# EAGLE board garbage2_halfrouted (EAGLE 5.06)
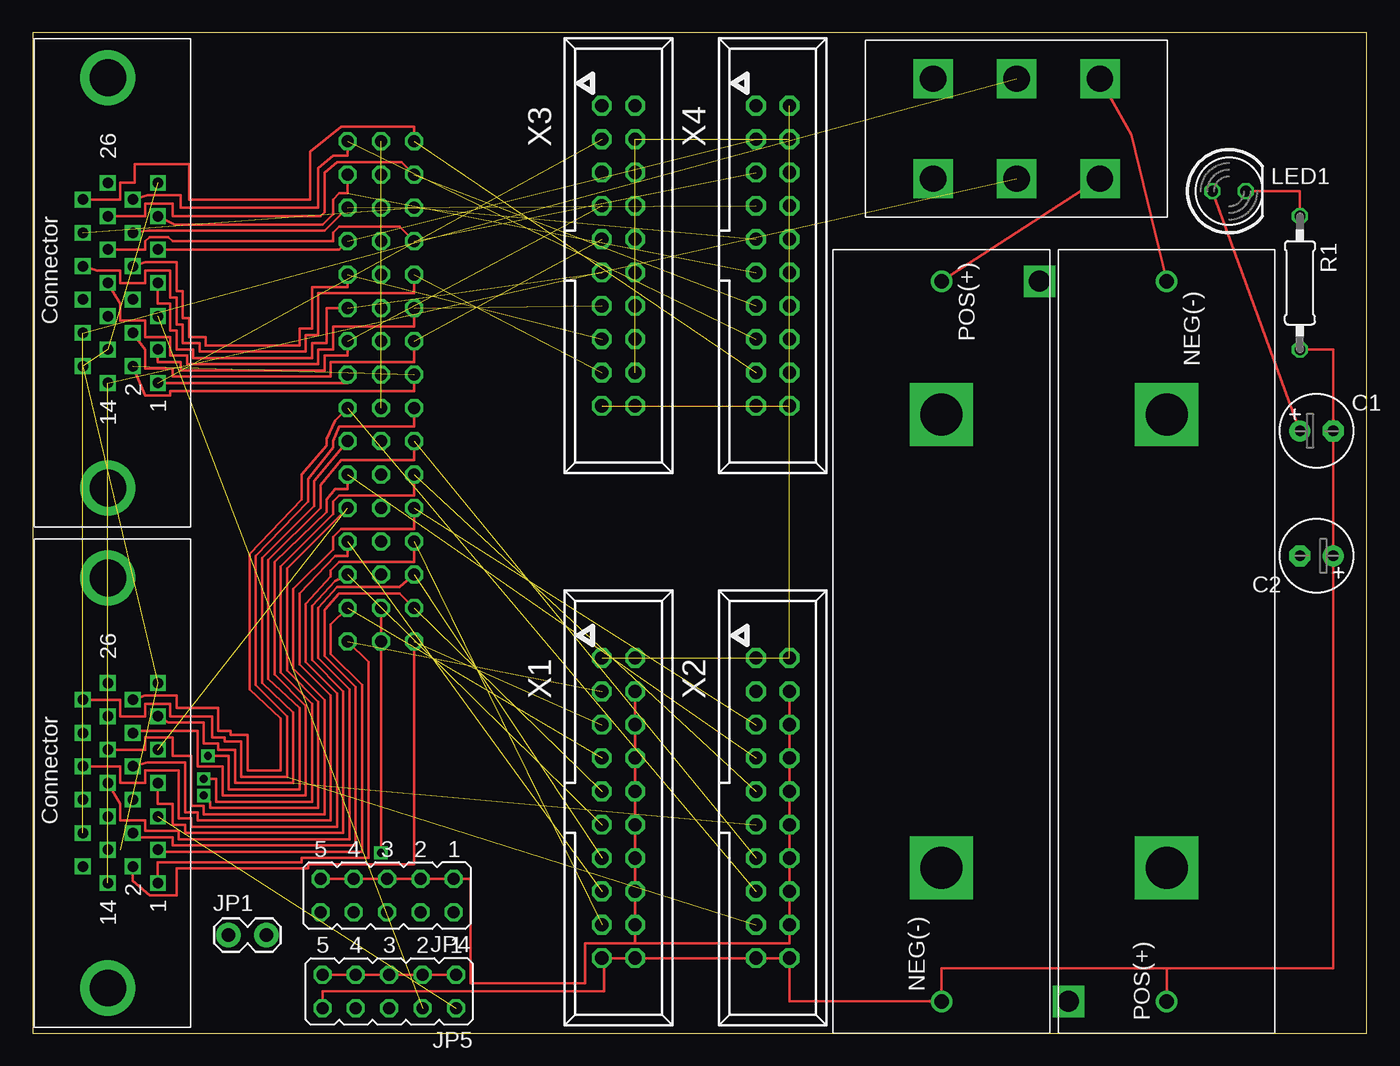
[diagram p0: board, top side]
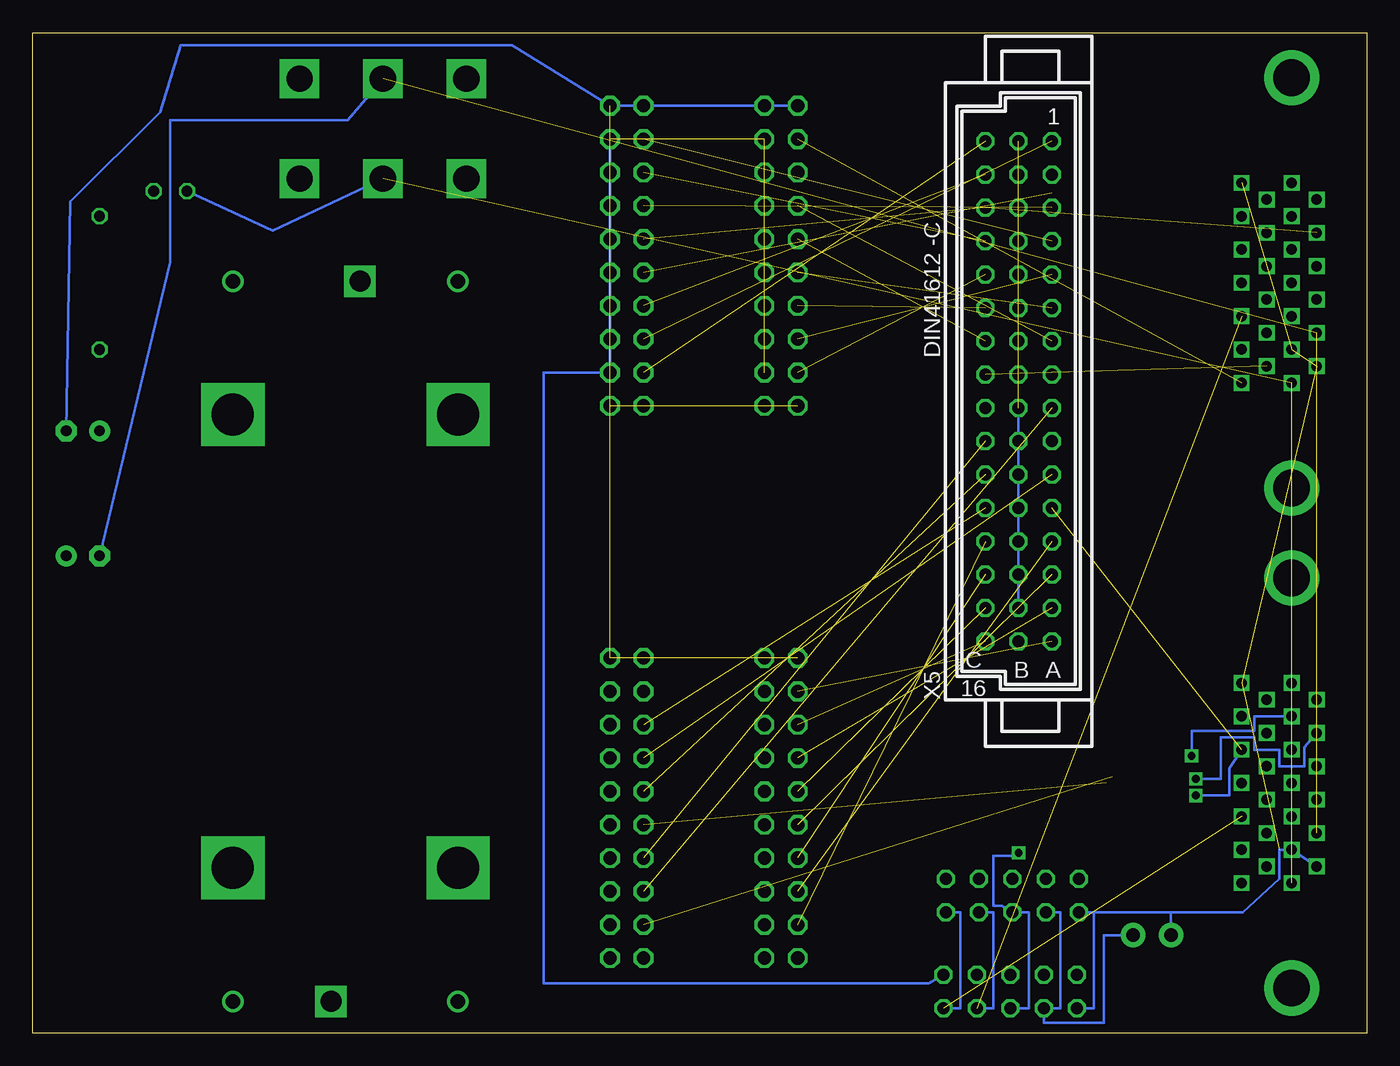
[diagram p1: board, bottom side, seen from below]

Size 101.6 x 76.2 mm. Coordinates in mm from the lower left corner, seen from the top.
Outline: 0,0 101.6,0 101.6,76.2 0,76.2 0,0
Copper layers (1*16): Top 0.0178mm / dielectric 1.4986mm / Bottom 0.0178mm
Design rules "SSC-EAGLE-2Lyr_v1.0.0.3": minimum track width 6mil, minimum drill 14mil, track to track 6mil, track to pad 6mil, pad to pad 6mil, via to via 6mil, smd to smd 6mil, copper to edge 20mil, drill to drill 16mil, minimum pad ring 8mil, minimum via ring 8mil, stop-mask expansion 3mil, vias tented up to drill 0mil, thermal gap 10mil

## Footprints (pad centres in the part's own frame; a part is rotated, then mirrored left to right if it is on the bottom)
MINI-DB26 = drill 0.8 square: P$1 7.62,3.81; P$2 6.35,1.905; P$3 5.08,3.81; P$4 3.81,1.905; P$5 2.54,3.81; P$6 1.27,1.905; P$7 0,3.81; P$8 -1.27,1.905; P$9 -2.54,3.81; P$10 -3.81,1.905; P$11 -5.08,3.81; P$12 -6.35,1.905; P$13 -7.62,3.81; P$14 7.62,0; P$15 6.35,-1.905; P$16 5.08,0; P$17 3.81,-1.905; P$18 2.54,0; P$19 1.27,-1.905; P$20 0,0; P$21 -1.27,-1.905; P$22 -2.54,0; P$23 -3.81,-1.905; P$24 -5.08,0; P$25 -6.35,-1.905; P$26 -7.62,0 | drill 2.8 round: P$27 15.621,0; P$28 -15.621,0
E2,5-6 = drill 0.813 pad 1.6 round: + -1.27,0 | drill 0.813 pad 1.6 octagon: - 1.27,0
1X02_LOCK = drill 1.016 pad 1.88 round: 1 -0.178,0; 2 2.718,0
JP5Q = drill 0.914 octagon: 1 -5.08,-1.27; 2 -5.08,1.27; 3 -2.54,-1.27; 4 -2.54,1.27; 5 0,-1.27; 6 0,1.27; 7 2.54,-1.27; 8 2.54,1.27; 9 5.08,-1.27; 10 5.08,1.27
LED5MM = drill 0.813 octagon: A -1.27,0; K 1.27,0
0207/10 = drill 0.813 octagon: 1 -5.08,0; 2 5.08,0
AA-BAT-BHAA-3 = drill 1.1 round: NEG -27.432,0; POS 27.432,0 | drill 1.6 square: P$3 27.432,-7.468 | drill 3.2 square: P$4 17.272,0; P$5 -17.272,0
SWITCH-DPST-S201031MS02Q = drill 2 square: PIN1 3.81,6.35; PIN2 3.81,0; PIN3 3.81,-6.35; PIN4 -3.81,6.35; PIN5 -3.81,0; PIN6 -3.81,-6.35
057-020-1 = drill 1 octagon: 1 -11.43,-1.27; 2 -11.43,1.27; 3 -8.89,-1.27; 4 -8.89,1.27; 5 -6.35,-1.27; 6 -6.35,1.27; 7 -3.81,-1.27; 8 -3.81,1.27; 9 -1.27,-1.27; 10 -1.27,1.27; 11 1.27,-1.27; 12 1.27,1.27; 13 3.81,-1.27; 14 3.81,1.27; 15 6.35,-1.27; 16 6.35,1.27; 17 8.89,-1.27; 18 8.89,1.27; 19 11.43,-1.27; 20 11.43,1.27
MAC48SH = drill 0.914 octagon: A1 2.54,19.05; A2 2.54,16.51; A3 2.54,13.97; A4 2.54,11.43; A5 2.54,8.89; A6 2.54,6.35; A7 2.54,3.81; A8 2.54,1.27; A9 2.54,-1.27; A10 2.54,-3.81; A11 2.54,-6.35; A12 2.54,-8.89; A13 2.54,-11.43; A14 2.54,-13.97; A15 2.54,-16.51; A16 2.54,-19.05; B1 0,19.05; B2 0,16.51; B3 0,13.97; B4 0,11.43; B5 0,8.89; B6 0,6.35; B7 0,3.81; B8 0,1.27; B9 0,-1.27; B10 0,-3.81; B11 0,-6.35; B12 0,-8.89; B13 0,-11.43; B14 0,-13.97; B15 0,-16.51; B16 0,-19.05; C1 -2.54,19.05; C2 -2.54,16.51; C3 -2.54,13.97; C4 -2.54,11.43; C5 -2.54,8.89; C6 -2.54,6.35; C7 -2.54,3.81; C8 -2.54,1.27; C9 -2.54,-1.27; C10 -2.54,-3.81; C11 -2.54,-6.35; C12 -2.54,-8.89; C13 -2.54,-11.43; C14 -2.54,-13.97; C15 -2.54,-16.51; C16 -2.54,-19.05

## Placement (x,y rotation side)
BANKA  MINI-DB26TYCO1761028-1  [MINI-DB26]  5.71,19.05 270 top
C1  [E2,5-6]  97.79,45.88 0 top
C2  [E2,5-6]  97.79,36.35 180 top
JP1  [1X02_LOCK]  15.08,7.46 0 top
JP4  [JP5Q]  26.99,10.48 180 top
JP5  [JP5Q]  27.15,3.17 180 top
LED1  [LED5MM]  91.12,64.14 0 top
R1  [0207/10]  96.52,57.15 270 top
U$1  AA-BAT-BHAA-3BHAA-3  [AA-BAT-BHAA-3]  86.36,29.84 270 top
U$2  AA-BAT-BHAA-3BHAA-3  [AA-BAT-BHAA-3]  69.22,29.84 90 top
U$3  MINI-DB26TYCO1761028-1  [MINI-DB26]  5.71,57.15 270 top
U$5  SWITCH-DPST-S201031MS02QDPST  [SWITCH-DPST-S201031MS02Q]  74.93,68.9 270 top
X1  057-020-1  [057-020-1]  44.61,17.14 270 top
X2  057-020-1  [057-020-1]  56.36,17.14 270 top
X3  057-020-1  [057-020-1]  44.61,59.21 270 top
X4  057-020-1  [057-020-1]  56.36,59.21 270 top
X5  MAC48SHE  [MAC48SH]  26.51,48.9 0 bottom

## Library data of the parts
BANKA U$1-U$3 U$5 = coxlab
C1 C2 R1 = resistor
JP1 = SparkFun
JP4 JP5 = jumper
LED1 = led
X1-X4 = con-panduit
X5 = con-vg

## Nets
C01: BANKA.P$1 X1.3 X5.A16
C02: BANKA.P$2 X1.5 X5.C16
C03: BANKA.P$3 X1.7 X5.A15
C04: BANKA.P$4 X1.9 X5.C15
C05: BANKA.P$7 X1.11 X5.A14
C06: BANKA.P$20 X1.13 X5.C14
C07: BANKA.P$8 X1.15 X5.A13
C08: BANKA.P$21 X1.17 X5.C13
C09: BANKA.P$9 X2.3 X5.A12
C10: BANKA.P$22 X2.5 X5.C12
C11: BANKA.P$10 X2.7 X5.A11
C12: BANKA.P$23 X2.9 X5.C11
C13: BANKA.P$11 X2.11 X5.A10
C14: BANKA.P$24 X2.13 X5.C10
C15: BANKA.P$12 X2.15 X5.A9
C16: BANKA.P$25 X2.17 X5.C9
C17: U$3.P$1 X3.3 X5.A8
C18: U$3.P$2 X3.5 X5.C8
C19: U$3.P$3 X3.7 X5.A7
C20: U$3.P$4 X3.9 X5.C7
C21: U$3.P$7 X3.11 X5.A6
C22: U$3.P$20 X3.13 X5.C6
C23: U$3.P$8 X3.15 X5.A5
C24: U$3.P$21 X3.17 X5.C5
C25: U$3.P$9 X4.3 X5.A4
C26: U$3.P$22 X4.5 X5.C4
C27: U$3.P$10 X4.7 X5.A3
C28: U$3.P$23 X4.9 X5.C3
C29: U$3.P$11 X4.11 X5.A2
C30: U$3.P$24 X4.13 X5.C2
C31: U$3.P$12 X4.15 X5.A1
C32: U$3.P$25 X4.17 X5.C1
GND: BANKA.P$13 BANKA.P$15 BANKA.P$16 C1.- C2.+ JP1.1 JP4.10 JP5.10 R1.2 U$1.POS U$2.NEG U$3.P$13 U$3.P$15 U$3.P$16 X1.1 X1.2 X1.19 X1.20 X2.1 X2.2 X2.19 X2.20 X3.1 X3.2 X3.19 X3.20 X4.1 X4.2 X4.19 X4.20
N$1: LED1.K R1.1
REF_OUT_A: JP4.1 JP4.3 JP4.5 JP4.7 JP4.9 X1.4 X1.6 X1.8 X1.10 X1.12 X1.14 X1.16 X1.18 X2.4 X2.6 X2.8 X2.10 X2.12 X2.14 X2.16 X2.18
REF_OUT_B: JP5.1 JP5.3 JP5.5 JP5.7 JP5.9 X3.4 X3.6 X3.8 X3.10 X3.12 X3.14 X3.16 X3.18 X4.4 X4.6 X4.8 X4.10 X4.12 X4.14 X4.16 X4.18
REFA: BANKA.P$5 JP4.2 JP5.2
REFB: JP4.4 JP5.4 U$3.P$5
SALINE: JP1.2 JP4.8 JP5.8
SELECT: JP4.6 JP5.6 X5.B1 X5.B2 X5.B3 X5.B4 X5.B5 X5.B6 X5.B7 X5.B8 X5.B9 X5.B10 X5.B11 X5.B12 X5.B13 X5.B14 X5.B15 X5.B16
V+: BANKA.P$14 C1.+ LED1.A U$3.P$14 U$5.PIN2
V-: BANKA.P$17 C2.- U$3.P$17 U$5.PIN5
VB+: U$2.POS U$5.PIN1
VB-: U$1.NEG U$5.PIN4

## Tracks (layer width: path | path; a pad name or v marks a point on that pad's centre or on a via)
C01  (1 unrouted)
  Top 0.203: BANKA.P$1 9.53,13.02 20.48,13.02 20.48,13.34 25.56,13.34 25.56,28.26 X5.A16
C02  (1 unrouted)
  Top 0.203: BANKA.P$2 7.62,11.59 8.89,10.48 10.95,10.48 10.95,12.54 20.95,12.54 20.95,12.86 29.05,12.86 X5.C16
C03  (1 unrouted)
  Top 0.203: 25.08,13.97 25.08,14.29 | 25.08,13.97 25.08,26.51 22.7,28.89 22.7,31.11 X5.A15 | 25.08,13.97 25.08,13.81 9.53,13.81 BANKA.P$3
C04  (1 unrouted)
  Top 0.203: X5.C15 27.94,33.5 23.34,33.5 22.23,32.23 22.23,28.73 24.61,26.35 24.61,14.29 10.64,14.29 10.64,14.92 8.26,14.92 BANKA.P$4 | X5.C15
C05  (1 unrouted)
  Top 0.203: X5.A14 23.02,34.45 21.27,32.54 21.27,28.42 23.65,26.04 23.65,15.24 11.59,15.24 11.59,15.88 10.64,15.88 10.64,17.46 9.53,17.46 BANKA.P$7
C06  (1 unrouted)
  Top 0.203: X5.C14 27.94,33.97 23.18,33.97 21.75,32.38 21.75,28.57 24.13,26.19 24.13,14.76 11.11,14.76 11.11,15.4 8.57,15.4 8.57,16.19 6.67,16.19 6.67,17.46 BANKA.P$20
C07  (1 unrouted)
  Top 0.203: X5.A13 23.97,36.35 23.02,36.35 20.32,33.5 20.32,28.1 22.7,25.72 22.7,16.19 12.54,16.19 12.54,16.83 11.59,16.83 11.59,20.64 8.73,20.64 BANKA.P$8
C08  (1 unrouted)
  Top 0.203: X5.C13 29.05,35.88 23.34,35.88 22.7,35.24 22.7,34.77 20.8,32.7 20.8,28.26 23.18,25.88 23.18,15.72 12.06,15.72 12.06,16.35 11.11,16.35 11.11,20 8.57,20 8.57,19.05 6.67,19.05 6.67,20.32 BANKA.P$21
C09  (via drill 0.6 pad 0.25)  (1 unrouted)
  Top 0.203: X5.A12 19.37,35.4 19.37,27.62 21.75,25.24 21.75,17.14 13.49,17.14 13.49,17.62 v13.02,18.1
  Bottom 0.203: v13.02,18.1 10.48,18.1 10.48,20.16 BANKA.P$9
C10  (1 unrouted)
  Top 0.203: X5.C12 29.05,38.42 23.5,38.42 22.86,37.78 22.86,36.83 19.84,33.81 19.84,27.78 22.23,25.4 22.23,16.67 13.02,16.67 13.02,17.3 12.06,17.3 12.06,21.11 10.64,21.11 10.64,22.54 8.57,22.54 8.57,21.59 BANKA.P$22
C11  (1 unrouted)
  Top 0.203: X5.A11 23.97,41.43 23.02,41.43 22.38,40.64 22.38,39.69 18.41,35.88 18.41,27.3 20.8,24.92 20.8,18.1 14.45,18.1 14.45,20.32 12.54,20.32 12.54,23.02 8.1,23.02 BANKA.P$10
C12  (via drill 0.6 pad 0.25)  (1 unrouted)
  Top 0.203: X5.C11 29.05,40.96 23.34,40.96 22.86,40.48 22.86,39.53 18.89,35.56 18.89,27.46 21.27,25.08 21.27,17.62 13.97,17.62 13.97,19.37 v13.02,19.37
  Bottom 0.203: v13.02,19.37 11.11,19.37 11.11,22.54 8.57,22.54 8.57,21.59 6.67,21.59 6.67,20.32 4.76,20.32 4.76,21.75 BANKA.P$23
C13  (1 unrouted)
  Top 0.203: X5.A10 21.43,42.07 21.43,40.16 17.46,36.2 17.46,26.67 19.84,24.45 19.84,19.05 15.4,19.05 15.4,21.59 14.13,21.59 14.13,22.07 13.02,22.07 13.02,23.65 10.32,23.65 BANKA.P$11
C14  (via drill 0.6 pad 0.25)  (1 unrouted)
  Top 0.203: X5.C10 29.05,43.66 23.5,43.66 21.91,41.75 21.91,40.01 17.94,36.04 17.94,26.99 20.32,24.77 20.32,18.57 14.92,18.57 14.92,21.11 v13.34,21.11
  Bottom 0.203: v13.34,21.11 13.34,23.02 8.57,23.02 8.57,24.13 BANKA.P$24
C15  (1 unrouted)
  Top 0.203: X5.A9 23.02,46.67 22.38,45.24 22.38,44.77 20.48,42.55 20.48,40.64 16.51,36.51 16.51,26.19 18.89,23.97 18.89,20 16.35,20 16.35,22.7 15.08,22.7 15.08,23.02 14.13,23.02 14.13,24.77 10.95,24.77 10.95,25.72 8.57,25.72 BANKA.P$12
C16  (1 unrouted)
  Top 0.203: X5.C9 29.05,46.2 23.34,46.2 22.86,45.09 22.86,44.61 20.95,42.23 20.95,40.48 16.99,36.35 16.99,26.51 19.37,24.13 19.37,19.53 15.88,19.53 15.88,22.23 14.61,22.23 14.61,22.54 13.65,22.54 13.65,24.13 10.48,24.13 10.48,25.08 8.57,25.08 8.57,24.13 6.67,24.13 6.67,25.4 BANKA.P$25
C17  (1 unrouted)
  Top 0.203: U$3.P$1 23.97,49.53 X5.A8
C18  (1 unrouted)
  Top 0.203: X5.C8 29.05,48.9 10.48,48.9 10.48,48.58 8.57,48.58 U$3.P$2
C19  (1 unrouted)
  Top 0.203: X5.A7 23.97,51.59 22.23,51.59 22.23,50.48 11.27,50.48 11.27,51.12 9.53,51.12 U$3.P$3
C20  (1 unrouted)
  Top 0.203: X5.C7 29.05,51.12 22.7,51.12 22.7,50.01 10.64,50.01 10.64,50.64 8.57,50.64 8.57,52.07 U$3.P$4
C21  (1 unrouted)
  Top 0.203: X5.A6 22.38,55.24 22.38,52.55 21.27,52.55 21.27,51.44 12.22,51.44 12.22,52.07 10.95,52.07 10.95,53.5 10.48,53.5 10.48,55.56 9.53,55.56 U$3.P$7
C22  (1 unrouted)
  Top 0.203: X5.C6 29.05,53.82 22.86,53.82 22.86,52.07 21.75,52.07 21.75,50.96 11.75,50.96 11.75,51.59 10.48,51.59 10.48,53.02 8.57,53.02 8.57,54.29 6.67,54.29 6.67,55.56 U$3.P$20
C23  (1 unrouted)
  Top 0.203: X5.A5 23.97,56.83 21.27,56.83 21.27,53.66 20.32,53.66 20.32,52.39 13.18,52.39 13.18,53.02 11.91,53.02 11.91,54.45 11.43,54.45 11.43,56.52 10.95,56.52 10.95,58.74 8.57,58.74 U$3.P$8
C24  (1 unrouted)
  Top 0.203: X5.C5 29.05,56.36 21.75,56.36 21.75,53.18 20.8,53.18 20.8,51.91 12.7,51.91 12.7,52.55 11.43,52.55 11.43,53.98 10.95,53.98 10.95,56.04 10.48,56.04 10.48,58.1 8.57,58.1 8.57,57.15 6.67,57.15 6.67,58.1 4.92,58.1 U$3.P$21
C25  (1 unrouted)
  Top 0.203: X5.A4 23.34,59.69 U$3.P$9
C26  (1 unrouted)
  Top 0.203: X5.C4 27.94,61.44 23.34,61.44 22.86,60.96 22.86,60.33 10.64,60.33 10.32,60.64 8.89,60.64 8.57,60.33 8.57,59.69 U$3.P$22
C27  (1 unrouted)
  Top 0.203: X5.A3 22.23,61.12 8.73,61.12 U$3.P$10
C28  (2 unrouted)
C29  (1 unrouted)
  Top 0.203: X5.A2 23.97,63.98 23.34,63.98 22.86,63.5 22.86,62.39 22.07,61.59 10.79,61.59 U$3.P$11
C30  (1 unrouted)
  Top 0.203: X5.C2 28.1,66.36 23.18,66.36 22.23,65.56 22.23,62.55 21.91,62.23 10.64,62.23 10.64,63.18 8.57,63.18 8.57,62.23 U$3.P$24
C31  (1 unrouted)
  Top 0.203: X5.A1 23.97,66.83 22.86,66.83 21.75,65.88 21.75,62.87 11.27,62.87 11.27,63.82 8.73,63.82 U$3.P$12
C32  (1 unrouted)
  Top 0.203: X5.C1 29.05,69.06 23.5,69.06 21.11,67.15 21.11,63.5 11.91,63.5 11.91,66.2 7.78,66.2 7.78,64.77 6.67,64.77 6.67,63.5 U$3.P$25
GND  (12 unrouted)
  Top 0.203: JP5.10 22.07,3.17 43.5,3.17 43.5,5.71 X1.19 X1.20 X2.19 X2.20 57.63,2.41 U$2.NEG 69.22,4.92 86.36,4.92 | 86.36,4.92 U$1.POS | 86.36,4.92 99.06,4.92 C2.+ C1.- 99.06,52.07 R1.2
  Bottom 0.203: 20.8,9.21 JP4.10 | 20.8,9.21 20.8,1.91 JP5.10 | JP5.10 | 14.9,9.21 JP1.1 | 14.9,9.21 20.8,9.21 | BANKA.P$15 BANKA.P$16 6.67,13.97 6.67,11.75 9.45,9.21 14.9,9.21 | C1.- 98.74,63.34 91.92,70.17 90.33,75.25 65.09,75.25 X4.2 X4.1 X3.2 X3.1
N$1
  Top 0.203: R1.1 96.52,64.14 LED1.K
REF_OUT_A
  Top 0.203: JP4.9 JP4.7 JP4.5 JP4.3 JP4.1 33.34,11.75 33.34,3.81 42.07,3.81 42.07,6.83 45.88,6.83 | 45.88,6.83 X1.18 X1.16 X1.14 X1.12 X1.10 X1.8 X1.6 X1.4 | 45.88,6.83 57.63,6.83 X2.18 X2.16 X2.14 X2.12 X2.10 X2.8 X2.6 X2.4
REF_OUT_B  (8 unrouted)
  Top 0.203: JP5.9 JP5.7 25.24,4.45 JP5.5 JP5.3 JP5.1
  Bottom 0.203: JP5.1 33.34,3.81 62.71,3.81 62.71,50.32 X4.18 X4.16 X4.14 X4.12 X4.10 X4.8 X4.6 X4.4
REFA  (1 unrouted)
  Bottom 0.203: JP4.2 30.96,9.21 30.96,1.91 JP5.2 | JP5.2
REFB  (1 unrouted)
  Bottom 0.203: JP4.4 28.42,9.21 28.42,1.91 JP5.4 | JP5.4
SALINE
  Bottom 0.203: JP4.8 23.34,9.21 23.34,1.91 JP5.8 | JP5.8 | JP5.8 24.61,0.79 20,0.79 20,7.46 JP1.2 | JP5.8
SELECT  (via drill 0.6 pad 0.25)  (8 unrouted)
  Top 0.203: X5.B16 | v26.51,13.73 X5.B16 | X5.B16 X5.B15
  Bottom 0.203: JP5.6 25.72,1.91 25.72,9.21 JP4.6 27.78,9.68 28.42,9.68 28.42,13.49 26.51,13.49 v26.51,13.73 | X5.B15 X5.B14 X5.B13 X5.B12 X5.B11 X5.B10 X5.B9
V+  (2 unrouted)
  Top 0.203: LED1.A C1.+
  Bottom 0.203: LED1.A 83.34,61.12 U$5.PIN2
V-  (2 unrouted)
  Bottom 0.203: C2.- 91.12,58.74 91.12,69.53 77.63,69.53 U$5.PIN5
VB+
  Top 0.203: U$2.POS U$5.PIN1
VB-
  Top 0.203: U$1.NEG 83.66,68.42 U$5.PIN4